# Altium PCB bbb.PcbDoc
Units mm, origin at the board's own origin, x right, y up, seen from the top; angles counter-clockwise.
Board outline 75 x 45.13 mm, 2 copper layers (Top Layer, Bottom Layer); 3 components, 47 nets, 76 pads, 2 vias.
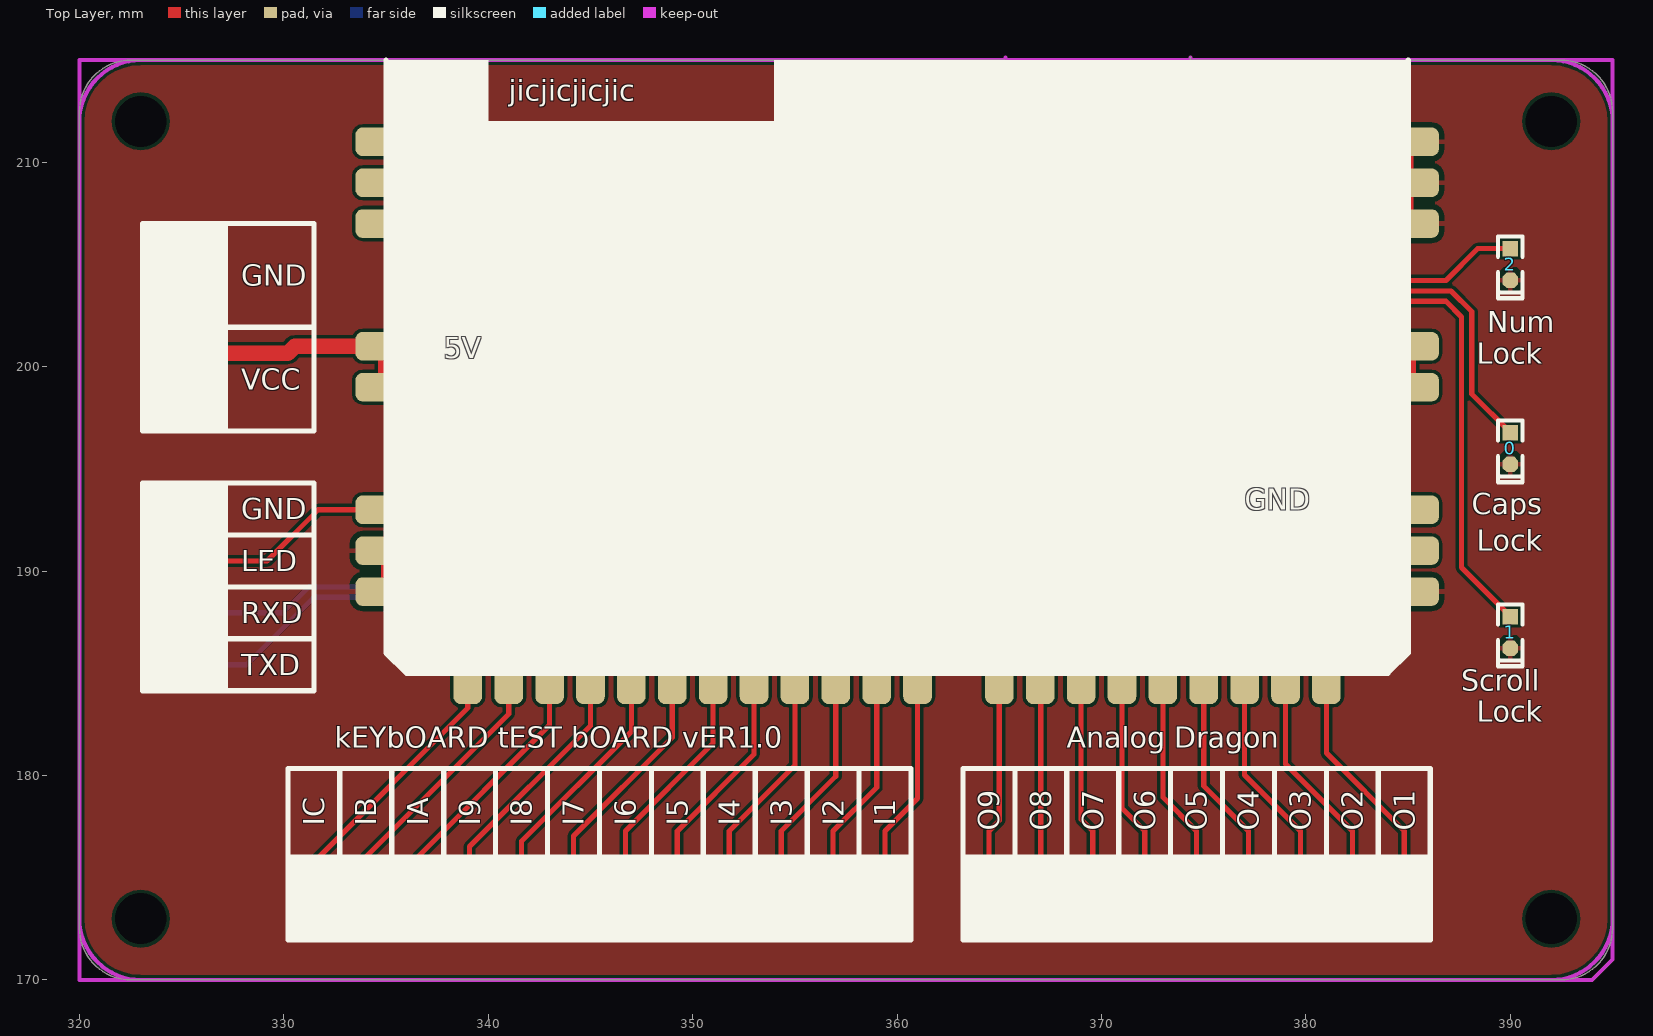
[diagram p0: Top Layer view]
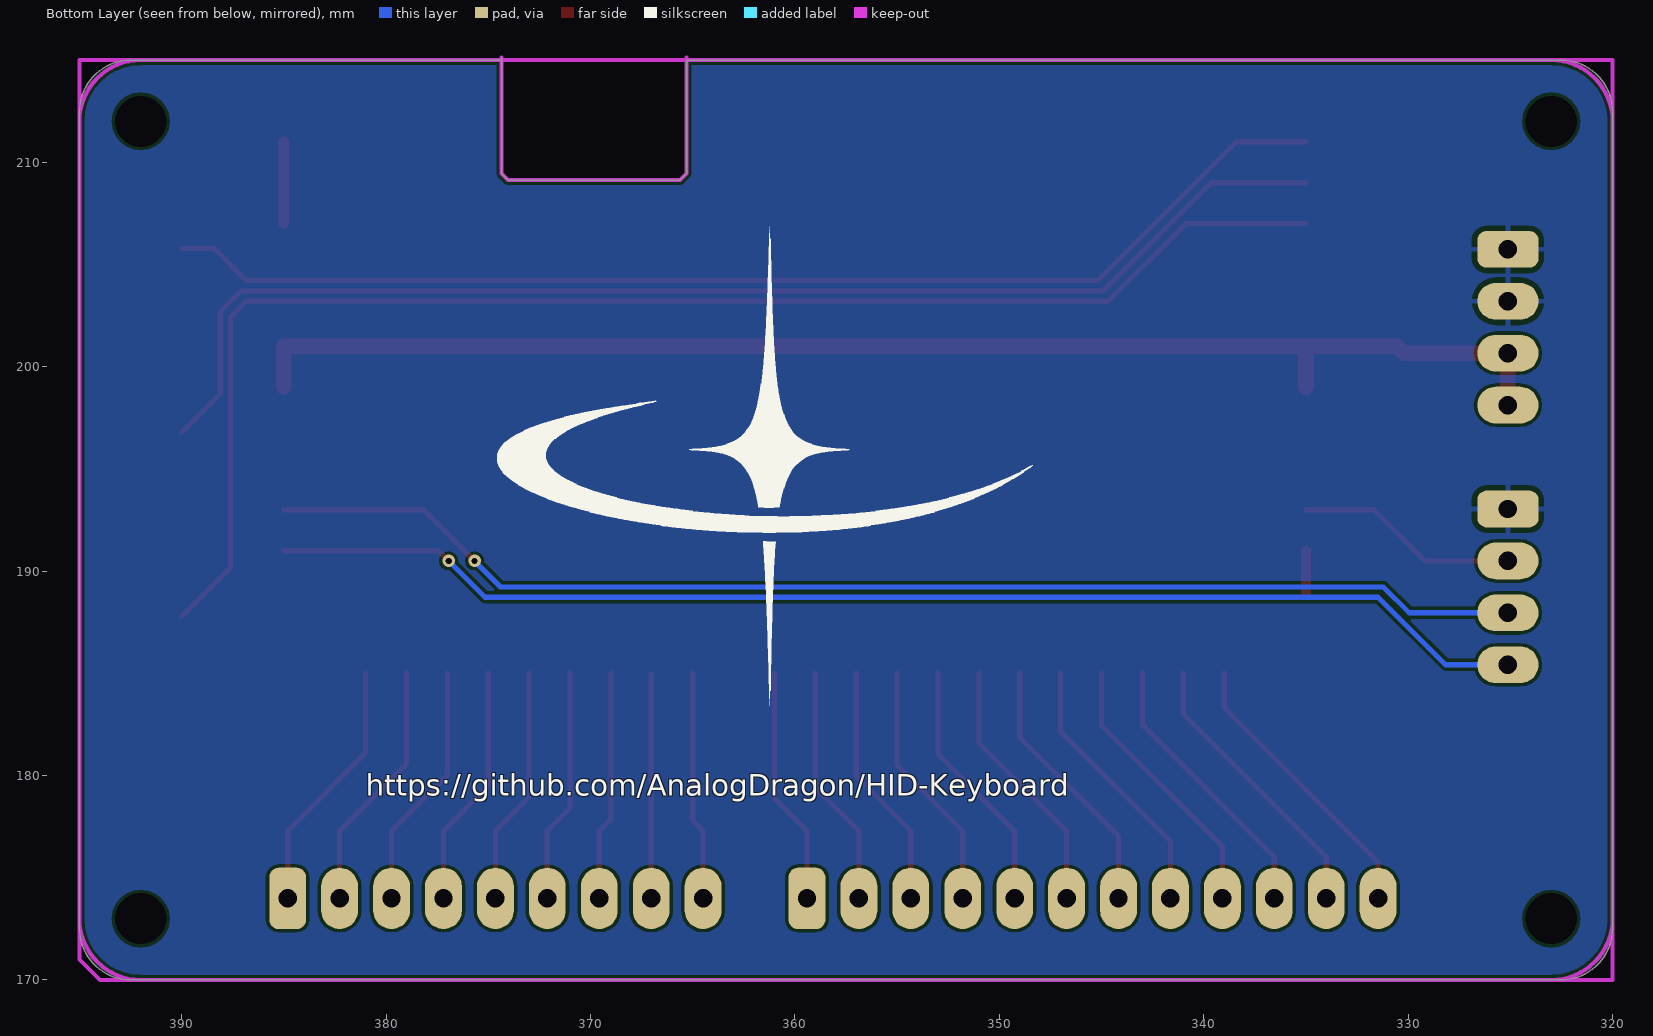
[diagram p1: Bottom Layer view, seen from below]
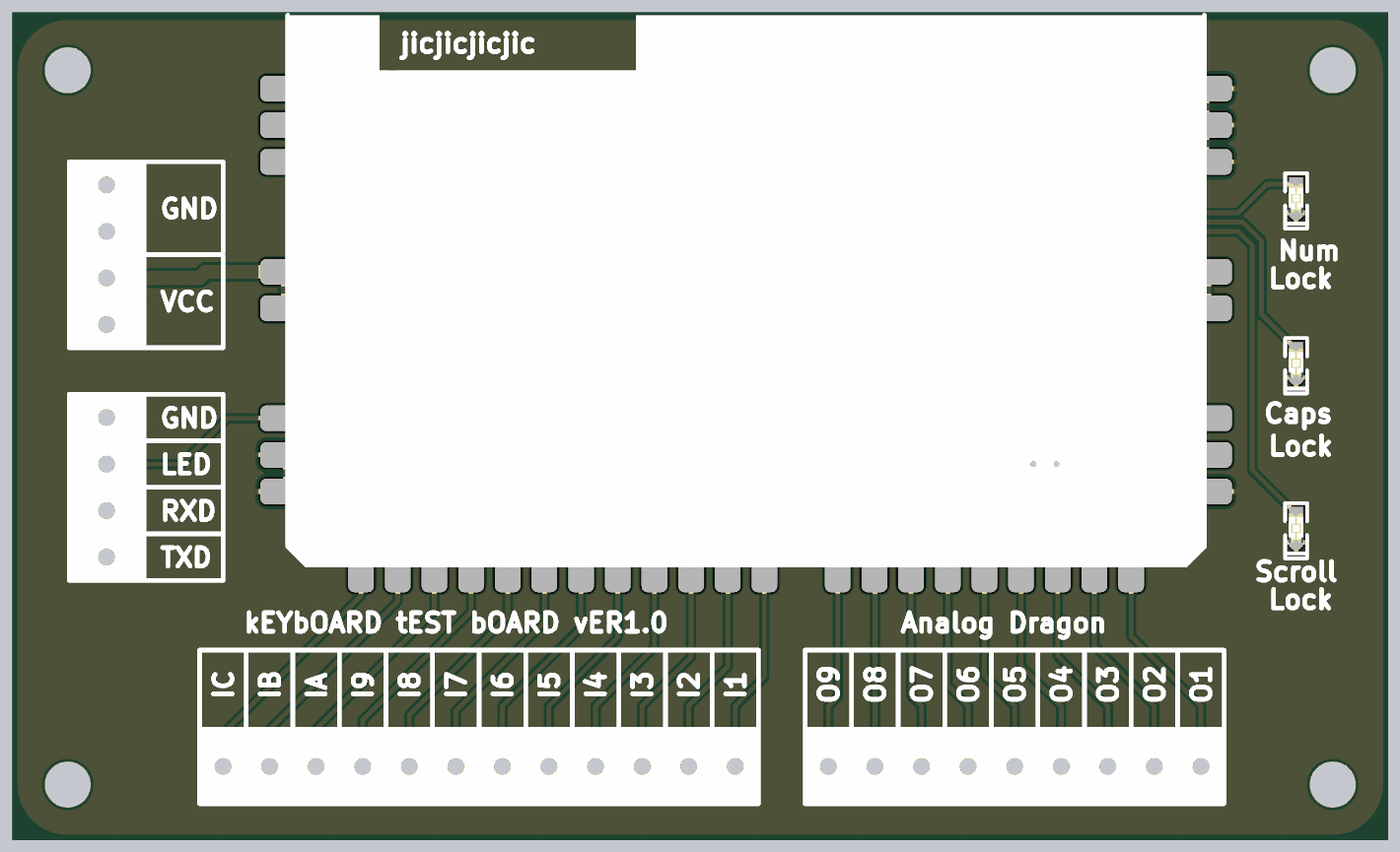
[diagram p2: 3D render of the assembled board from above, using the file's embedded part models]

## Layer stack, top to bottom
Top Layer: signal copper 0.0356
Dielectric: dielectric 0.32, FR-4, Dk 4.8
Bottom Layer: signal copper 0.0356

## Board outline
323,215 365.301,215 365.301,209.455 365.626,209.13 374.026,209.13 374.351,209.455 374.351,215.13 374.351,215 392.46,215 cw(c392.46,212.46) 395,212.46 395,212 395,172.54 cw(c392.46,172.54) 392.46,170 392,170 322.54,170 cw(c322.54,172.54) 320,172.54 320,173 320,212.46 cw(c322.54,212.46) 322.54,215 323,215

## Design rules (kind name [scope] priority, off if disabled: settings)
Clearance [All] p1: gap=0.152
ComponentClearance [All] p1 off: gap=0.254 collisioncheckmode=3 verticalgap=0.254 showdistances=FALSE
DiffPairsRouting [All] p1: maxlimit=0.254 minlimit=0.254 mostfreqgap=0.254 maxuncoupledlength=12.7
Height [All] p1 off: minheight=0 maxheight=25.4 prefheight=12.7
PolygonConnect PolygonConnect_1 [IsVia] p1: connectstyle=Direct reliefconductorwidth=0.254 reliefentries=4 polygonreliefangle="90 Angle" airgapwidth=0.254
PolygonConnect [All] p2: connectstyle=Relief reliefconductorwidth=0.254 reliefentries=4 polygonreliefangle="90 Angle" airgapwidth=0.254
RoutingVias [All] p1: holewidth=0.711 width=1.27 viastyle="Through Hole" minholewidth=0.711 minwidth=1.27 maxholewidth=0.711 maxwidth=1.27
SolderMaskExpansion [All] p1: expansion=0.102
Width [All] p1: maxlimit=2.54 minlimit=0.254 preferedwidth=0.254
25 further rules are at their usual default settings.

## Classes and differential pairs
differential pair USB: +USB_P -USB_N
differential pair USB0: +USB0_P -USB0_N

## Components (designator, comment, footprint, x,y, rotation, side; value= is the part's Value field where it differs from the comment)
0 "Comment" "LED 0603W" 390,196 r270 top
1 "Comment" "LED 0603W" 390,187 r270 top
2 "Comment" "LED 0603W" 390,205 r270 top

## Footprints (in the part's own frame and the unit in brackets; to place one, negate y for a bottom-side part, rotate by r counter-clockwise, add the part's x,y. Pads: shape width x height; smd on the part's side, far side on the other; paste and mask are expansions set on the pad)
"LED 0603W" [mil] "白色0603LED"
  rect 30x30 smd: 1(-30.59,0)
  oct 30x30 smd: 2(30.59,0)
  silkscreen extent -54,-24 65,24, body extent -31,-16 32,16, height 24

## Free pads (board coordinates)
  round 0 hole 2.5: 0(323,173) 0(323,212) 0(392,173) 0(392,212)
  oval 3x1.8 hole 0.9: 1(325.12,190.5) 1(325.12,203.2) 3(325.12,187.96) 3(325.12,200.66) 4(325.12,185.42) 4(325.12,198.12)
  oval 1.8x3 hole 0.9: 1(334.01,173.99) 1(344.17,173.99) 1(354.33,173.99) 1(367.03,173.99) 1(377.19,173.99) 2(331.47,173.99) 2(341.63,173.99) 2(351.79,173.99) 2(364.49,173.99) 2(374.65,173.99) 3(336.55,173.99) 3(346.71,173.99) 3(356.87,173.99) 3(369.57,173.99) 3(379.73,173.99) 4(339.09,173.99) 4(349.25,173.99) 4(372.11,173.99) 4(382.27,173.99)
  rrect50% 3x1.8 hole 0.9: 2(325.12,193.04) 2(325.12,205.74)
  rrect50% 1.8x3 hole 0.9: 2(384.81,173.99) 4(359.41,173.99)
  rrect50% 3x1.4 smd: 29(335,189) 29(335,191) 29(335,193) 29(335,199) 29(335,201) 29(335,207) 29(335,209) 29(335,211) 29(385,189) 29(385,191) 29(385,193) 29(385,199) 29(385,201) 29(385,207) 29(385,209) 29(385,211)
  rrect50% 1.4x3 smd: 29(339,185) 29(341,185) 29(343,185) 29(345,185) 29(347,185) 29(349,185) 29(351,185) 29(353,185) 29(355,185) 29(357,185) 29(359,185) 29(361,185) 29(365,185) 29(367,185) 29(369,185) 29(371,185) 29(373,185) 29(375,185) 29(377,185) 29(379,185) 29(381,185)

## Via types
v1: diameter 0.61, hole 0.305, Top Layer to Bottom Layer, 2 vias

## Nets (pads, with @x,y where several pads share a name; then routed paths per layer and width w, separated by ;. In a path a pad name is that pad's centre, name@x,y a point inside that pad or via, vN(x,y) a via of type N, cw(c..) or ccw(c..) an arc to the next point about the centre after c; other vN are vias at no path point)
3V3: 
GND: 0.2 1.2 2.2 pad.1@325.12,203.2 pad.2@325.12,193.04 pad.2@325.12,205.74 pad.29@335,189 pad.29@335,191 pad.29@385,189 pad.29@385,207 pad.29@385,209 pad.29@385,211 | length 6
  Top Layer w0.508: pad.29@335,189 pad.29@335,191 ; pad.29@385,207 385,209 pad.29@385,211
KI1: pad.4@359.41,173.99 pad.29@361,185 | length 11.7
  Top Layer w0.254: pad.4@359.41,173.99 359.41,177.292 361,178.882 pad.29@361,185
KI2: pad.3@356.87,173.99 pad.29@359,185 | length 11.9
  Top Layer w0.254: pad.3@356.87,173.99 356.87,177.292 359,179.422 pad.29@359,185
KI3: pad.1@354.33,173.99 pad.29@357,185 | length 12.1
  Top Layer w0.254: pad.1@354.33,173.99 354.33,177.292 357,179.962 pad.29@357,185
KI4: pad.2@351.79,173.99 pad.29@355,185 | length 12.3
  Top Layer w0.254: pad.2@351.79,173.99 351.79,177.292 355,180.502 pad.29@355,185
KI5: pad.4@349.25,173.99 pad.29@353,185 | length 12.6
  Top Layer w0.254: pad.4@349.25,173.99 349.25,177.292 353,181.042 pad.29@353,185
KI6: pad.3@346.71,173.99 pad.29@351,185 | length 12.8
  Top Layer w0.254: pad.3@346.71,173.99 346.71,177.292 351,181.582 pad.29@351,185
KI7: pad.1@344.17,173.99 pad.29@349,185 | length 13
  Top Layer w0.254: pad.1@344.17,173.99 344.17,177.038 349,181.868 pad.29@349,185
KI8: pad.2@341.63,173.99 pad.29@347,185 | length 13.2
  Top Layer w0.254: pad.2@341.63,173.99 341.63,176.784 347,182.154 pad.29@347,185
KI9: pad.4@339.09,173.99 pad.29@345,185 | length 13.5
  Top Layer w0.254: pad.4@339.09,173.99 339.09,176.53 345,182.44 pad.29@345,185
KI10: pad.3@336.55,173.99 pad.29@343,185 | length 13.7
  Top Layer w0.254: pad.3@336.55,173.99 336.55,176.022 343,182.472 pad.29@343,185
KI11: pad.1@334.01,173.99 pad.29@341,185 | length 13.9
  Top Layer w0.254: pad.1@334.01,173.99 334.01,176.022 341,183.012 pad.29@341,185
KI12: pad.2@331.47,173.99 pad.29@339,185 | length 14.1
  Top Layer w0.254: pad.2@331.47,173.99 331.47,175.768 339,183.298 pad.29@339,185
KO1: pad.2@384.81,173.99 pad.29@381,185 | length 12.6
  Top Layer w0.254: pad.29@381,185 381,181.102 384.81,177.292 pad.2@384.81,173.99
KO2: pad.4@382.27,173.99 pad.29@379,185 | length 12.4
  Top Layer w0.254: pad.29@379,185 379,180.562 382.27,177.292 pad.4@382.27,173.99
KO3: pad.3@379.73,173.99 pad.29@377,185 | length 12.1
  Top Layer w0.254: pad.29@377,185 377,180.022 379.73,177.292 pad.3@379.73,173.99
KO4: pad.1@377.19,173.99 pad.29@375,185 | length 11.9
  Top Layer w0.254: pad.29@375,185 375,179.482 377.19,177.292 pad.1@377.19,173.99
KO5: pad.2@374.65,173.99 pad.29@373,185 | length 11.7
  Top Layer w0.254: pad.29@373,185 373,178.942 374.65,177.292 pad.2@374.65,173.99
KO6: pad.4@372.11,173.99 pad.29@371,185 | length 11.5
  Top Layer w0.254: pad.29@371,185 371,178.402 372.11,177.292 pad.4@372.11,173.99
KO7: pad.3@369.57,173.99 pad.29@369,185 | length 11.2
  Top Layer w0.254: pad.29@369,185 369,177.862 369.57,177.292 pad.3@369.57,173.99
KO8: pad.1@367.03,173.99 pad.29@367,185 | length 11
  Top Layer w0.254: pad.1@367.03,173.99 pad.29@367.03,184.97
KO9: pad.2@364.49,173.99 pad.29@365,185 | length 11.2
  Top Layer w0.254: pad.2@364.49,173.99 364.49,177.292 365,177.802 pad.29@365,185
LED1: 2.1 pad.29@335,211 | length 58.5
  Top Layer w0.254: pad.29@335,211 338.402,211 345.186,204.216 386.842,204.216 388.403,205.777 2.1
LED2: 0.1 pad.29@335,209 | length 62.4
  Top Layer w0.254: pad.29@335,209 339.64,209 344.932,203.708 387.096,203.708 388.112,202.692 388.112,198.665 0.1
LED3: 1.1 pad.29@335,207 | length 70.2
  Top Layer w0.254: pad.29@335,207.01 340.868,207.01 344.678,203.2 386.842,203.2 387.604,202.438 387.604,190.173 1.1
LED10: 
LED20: 
LED30: 
LED_DATA: pad.1@325.12,190.5 pad.29@335,193 | length 10.9
  Top Layer w0.254: pad.1@325.12,190.5 329.184,190.5 331.684,193 pad.29@335,193
NetQ1_1: 
NetR1_1: 
NetR2_1: 
NRST: 
OSC_IN: 
OSC_OUT: 
SPI_CLK: 
SPI_DO: 
SWCLK: 
SWDIO: 
UART_RX: pad.3@325.12,187.96 pad.29@385,193 | length 62.5
  Top Layer w0.254: v1(375.666,190.5) 378.166,193 ; 378.714,193 378.166,193 ; pad.29@385,193 378.166,193
  Bottom Layer w0.254: pad.3@325.12,187.96 329.946,187.96 331.216,189.23 374.396,189.23 v1(375.666,190.5)
UART_TX: pad.4@325.12,185.42 pad.29@385,191 | length 62.2
  Top Layer w0.254: v1(376.936,190.5) 377.436,191 pad.29@385,191
  Bottom Layer w0.254: pad.4@325.12,185.42 328.168,185.42 331.47,188.722 375.158,188.722 v1(376.936,190.5)
USB0_N: 
USB0_P: 
USB_N: 
USB_P: 
VBUS: pad.3@325.12,200.66 pad.4@325.12,198.12 pad.29@335,199 pad.29@335,201 pad.29@385,199 pad.29@385,201 | length 66.6
  Top Layer w0.762: pad.4@325.12,198.12 325.12,200.66 330.2,200.66 330.54,201 pad.29@335,201 ; pad.29@335,199 pad.29@335,201 ; pad.29@385,199 385,201 pad.29@335,201

## Polygon pours and split planes (outlines as drawn)
GND on Bottom Layer "Top Layer-No Net" (solid, remove dead copper, pour order 5): 320,215 320,170 395,170 395,215
GND on Top Layer "Top Layer-No Net" (solid, remove dead copper, pour order 7): 320,215 320,170 395,170 395,215

## Keep-outs
Keep-Out Layer:
  lines w0.2: 320,173 ccw(c323,173) 323,170 ; 320,212 cw(c323,212) 323,215 ; 365.301,215.13 365.301,209.455 365.626,209.13 374.026,209.13 374.351,209.455 374.351,215.13 ; 392,170 ccw(c392,173) 395,173 ; 392,215 cw(c392,212) 395,212 ; 320,170 394,170 395,171 395,215 320,215 320,170

## Silkscreen, mask and mechanical layers (free items; w line width, h text height)
Top Overlay:
  drawing of 180 lines, arcs and shapes, not listed
  text "jicjicjicjic" at 341,213 h1.02
  text "GND" at 327.914,203.962 h1.02
  text "Num" at 388.874,201.676 h1.02
  text "5V" at 337.82,200.406 h1.02
  text "Lock" at 388.366,200.152 h1.02
  text "VCC" at 327.914,198.882 h1.02
  text "GND" at 377,193 h1.02
  text "Caps" at 388.112,192.786 h1.02
  text "GND" at 327.914,192.532 h1.02
  text "Lock" at 388.366,191.008 h1.02
  text "LED" at 327.914,189.992 h1.02
  text "RXD" at 327.914,187.452 h1.02
  text "TXD" at 327.914,184.912 h1.02
  text "Scroll" at 387.604,184.15 h1.02
  text "Lock" at 388.366,182.626 h1.02
  text "kEYbOARD tEST bOARD vER1.0" at 332.486,181.356 h1.02
  text "Analog Dragon" at 368.3,181.356 h1.02
  text "IC" at 331.978,177.546 h1.02 r90
  text "IB" at 334.518,177.546 h1.02 r90
  text "IA" at 337.058,177.546 h1.02 r90
  text "I9" at 339.598,177.546 h1.02 r90
  text "I8" at 342.138,177.546 h1.02 r90
  text "I7" at 344.678,177.546 h1.02 r90
  text "I6" at 347.218,177.546 h1.02 r90
  text "I5" at 349.758,177.546 h1.02 r90
  text "I4" at 352.298,177.546 h1.02 r90
  text "I3" at 354.838,177.546 h1.02 r90
  text "I2" at 357.378,177.546 h1.02 r90
  text "I1" at 359.918,177.546 h1.02 r90
  text "O9" at 364.998,177.292 h1.02 r90
  text "O8" at 367.538,177.292 h1.02 r90
  text "O7" at 370.078,177.292 h1.02 r90
  text "O6" at 372.618,177.292 h1.02 r90
  text "O5" at 375.158,177.292 h1.02 r90
  text "O4" at 377.698,177.292 h1.02 r90
  text "O3" at 380.238,177.292 h1.02 r90
  text "O2" at 382.778,177.292 h1.02 r90
  text "O1" at 385.318,177.292 h1.02 r90
Bottom Overlay:
  drawing of 1213 lines, arcs and shapes, not listed
  text "https://github.com/AnalogDragon/HID-Keyboard" at 381,179 h1.06